# EAGLE board distance (EAGLE 7.5.0)

Size 100 x 80 mm. Coordinates in mm from the lower left corner, seen from the top.
Outline: 0,0 100,0 100,80 0,80 0,0
Copper layers (1*16): Top 0.035mm / dielectric 1.5mm / Bottom 0.035mm
Design rules "default": minimum track width 10mil, minimum drill 24mil, track to track 8mil, track to pad 8mil, pad to pad 8mil, via to via 8mil, smd to smd 8mil, copper to edge 40mil, drill to drill 8mil, minimum pad ring 10mil, minimum via ring 8mil, stop-mask expansion 4mil, vias tented up to drill 0mil, thermal gap 10mil

## Footprints (pad centres in the part's own frame; a part is rotated, then mirrored left to right if it is on the bottom)
WROOM-02 = smd 0.9 x 0.9: 1 -8.55,2.9; 2 -8.55,1.4; 3 -8.55,-0.1; 4 -8.55,-1.6; 5 -8.55,-3.1; 6 -8.55,-4.6; 7 -8.55,-6.1; 8 -8.55,-7.6; 9 -8.55,-9.1; 10 8.55,-9.1; 11 8.55,-7.6; 12 8.55,-6.1; 13 8.55,-4.6; 14 8.55,-3.1; 15 8.55,-1.6; 16 8.55,-0.1; 17 8.55,1.4; 18 8.55,2.9
DIL16 = drill 0.813 long: 1 -8.89,-3.81; 2 -6.35,-3.81; 3 -3.81,-3.81; 4 -1.27,-3.81; 5 1.27,-3.81; 6 3.81,-3.81; 7 6.35,-3.81; 8 8.89,-3.81; 9 8.89,3.81; 10 6.35,3.81; 11 3.81,3.81; 12 1.27,3.81; 13 -1.27,3.81; 14 -3.81,3.81; 15 -6.35,3.81; 16 -8.89,3.81
0309/12 = drill 0.813 octagon: 1 -6.35,0; 2 6.35,0
B3F-10XX = drill 1.016 long: 1 -3.251,2.261; 2 3.251,2.261; 3 -3.251,-2.261; 4 3.251,-2.261
LM35 = drill 0.8 square: P$1 -2.54,0; P$2 0,0; P$3 2.54,0

## Placement (x,y rotation side)
IC1  ESP-WROOM-02  [WROOM-02]  43.18,33.02 0 top
IC2  MCP3008  [DIL16]  77.47,30.48 90 top
R1  10k  [0309/12]  16.51,20.32 0 top
R2  10k  [0309/12]  16.51,45.72 0 top
R3  10k  [0309/12]  16.51,31.75 0 top
R4  10k  [0309/12]  16.51,26.67 0 top
R5  10k  [0309/12]  16.51,52.07 0 top
S1  [B3F-10XX]  31.75,15.24 0 top
S2  [B3F-10XX]  63.5,13.97 0 top
温度センサー  LM35  [LM35]  45.72,52.07 0 top

## Library data of the parts
IC1 IC2 R1-R5 温度センサー = MyLibraries
S1 S2 = MyLibraries; MPN: B3F-1000; OC_FARNELL: 176432; OC_NEWARK: 36M3542

## Nets
+3.3V: IC1.1 IC2.15 IC2.16 R2.1 R3.1 R4.1 R5.2 温度センサー.P$1
GND: IC1.9 IC1.13 IC1.18 IC2.5 IC2.6 IC2.7 IC2.8 IC2.9 IC2.14 R1.1 S1.1 S2.3 温度センサー.P$3
N$1: IC1.6 IC2.10 R1.2
N$2: IC1.5 IC2.11
N$3: IC1.4 IC2.12
N$4: IC1.15 IC1.17 R4.2 S2.1
N$5: IC1.7 R2.2
N$6: IC2.2
N$7: IC1.12
N$8: IC1.3 IC2.13
N$9: IC1.11
N$10: IC1.8 R3.2 S1.3
N$11: IC2.1 温度センサー.P$2
N$12: IC2.3
N$13: IC2.4
N$15: IC1.2 R5.1

## Tracks (layer width: path | path; a pad name or v marks a point on that pad's centre or on a via)
+3.3V  (7 unrouted)
GND  (12 unrouted)
N$1  (2 unrouted)
N$2  (1 unrouted)
N$3  (1 unrouted)
N$4  (3 unrouted)
N$5  (1 unrouted)
N$8  (1 unrouted)
N$10  (2 unrouted)
N$11  (1 unrouted)
N$15  (1 unrouted)